# EAGLE board seven_step_with_rot_encoder (EAGLE 5.07)
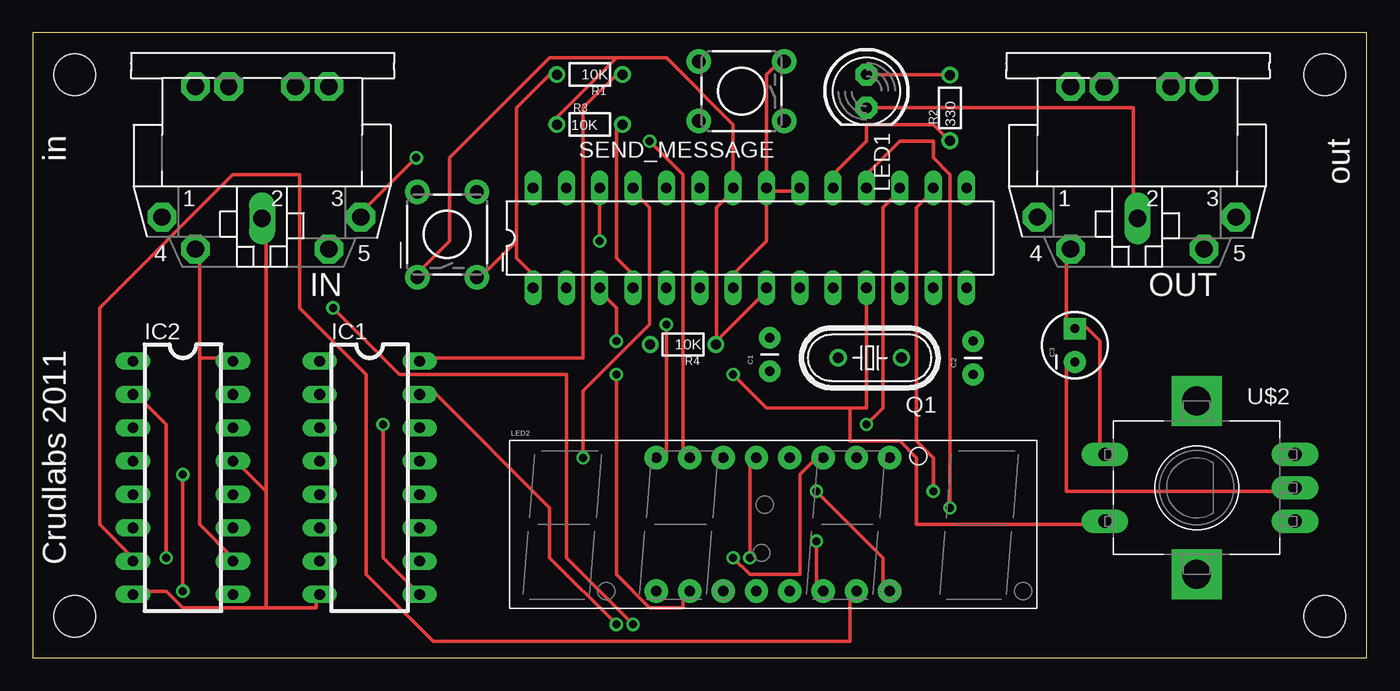
[diagram p0: board, top side]
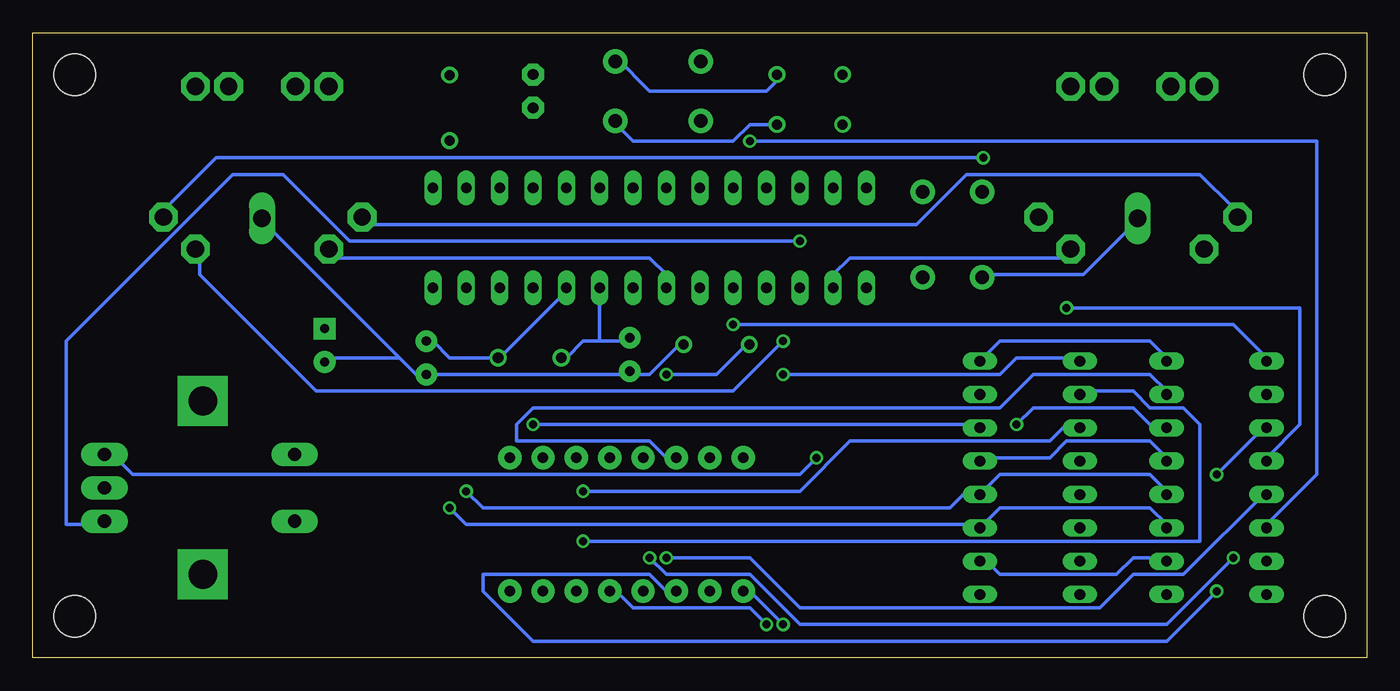
[diagram p1: board, bottom side, seen from below]

Size 101.6 x 47.62 mm. Coordinates in mm from the lower left corner, seen from the top.
Outline: 0,0 101.6,0 101.6,47.62 0,47.62 0,0
Copper layers (1*16): Top 0.035mm / dielectric 1.5mm / Bottom 0.035mm
Design rules "default": minimum track width 10mil, minimum drill 24mil, track to track 8mil, track to pad 8mil, pad to pad 8mil, via to via 8mil, smd to smd 8mil, copper to edge 40mil, drill to drill 8mil, minimum pad ring 10mil, minimum via ring 8mil, stop-mask expansion 4mil, vias tented up to drill 0mil, thermal gap 10mil
Holes 3.17 mm at 3.17,44.45 98.42,44.45 98.42,3.17 3.17,3.17

## Footprints (pad centres in the part's own frame; a part is rotated, then mirrored left to right if it is on the bottom)
DIL28-3 = drill 0.813 long: 1 -16.51,-3.81; 2 -13.97,-3.81; 3 -11.43,-3.81; 4 -8.89,-3.81; 5 -6.35,-3.81; 6 -3.81,-3.81; 7 -1.27,-3.81; 8 1.27,-3.81; 9 3.81,-3.81; 10 6.35,-3.81; 11 8.89,-3.81; 12 11.43,-3.81; 13 13.97,-3.81; 14 16.51,-3.81; 15 16.51,3.81; 16 13.97,3.81; 17 11.43,3.81; 18 8.89,3.81; 19 6.35,3.81; 20 3.81,3.81; 21 1.27,3.81; 22 -1.27,3.81; 23 -3.81,3.81; 24 -6.35,3.81; 25 -8.89,3.81; 26 -11.43,3.81; 27 -13.97,3.81; 28 -16.51,3.81
TACTILE-PTH = drill 1.016 pad 1.88 round: 1 -3.251,2.261; 2 3.251,2.261; 3 -3.251,-2.261; 4 3.251,-2.261
CAP-PTH-SMALL = drill 0.7 pad 1.651 round: 1 0,0; 2 2.54,0
CPOL-RADIAL-10UF-25V = drill 0.7 pad 1.651 square: 1 1.27,0 | drill 0.7 pad 1.651 round: 2 -1.27,0
DIL16 = drill 0.813 long: 1 -8.89,-3.81; 2 -6.35,-3.81; 3 -3.81,-3.81; 4 -1.27,-3.81; 5 1.27,-3.81; 6 3.81,-3.81; 7 6.35,-3.81; 8 8.89,-3.81; 9 8.89,3.81; 10 6.35,3.81; 11 3.81,3.81; 12 1.27,3.81; 13 -1.27,3.81; 14 -3.81,3.81; 15 -6.35,3.81; 16 -8.89,3.81
CP-2350 = drill 1.321 pad 2.184 octagon: 1 7.62,12.58; 3 -7.52,12.58; 4 5.08,15.02; 5 -5.08,15.02; PE -2.54,2.62; PE1 -5.08,2.62; PE2 5.08,2.62; PE@ 2.54,2.62 | drill 1.321 long: 2 0,12.68
LED5MM = drill 0.813 pad 1.676 octagon: A -1.27,0; K 1.27,0
7-SEGMENT-4DIGIT-YOUNGSUN = drill 0.8 pad 1.778 round: 1 -8.89,-5.08; 2 -6.35,-5.08; 3 -3.81,-5.08; 4 -1.27,-5.08; 5 1.27,-5.08; 6 3.81,-5.08; 7 6.35,-5.08; 8 8.89,-5.08; 9 8.89,5.08; 10 6.35,5.08; 11 3.81,5.08; 12 1.27,5.08; 13 -1.27,5.08; 14 -3.81,5.08; 15 -6.35,5.08; 16 -8.89,5.08
HC49U-V = drill 0.813 round: 1 -2.413,0; 2 2.413,0
1/6W-RES = drill 0.762 round: 1 -2.5,0; 2 2.5,0
TW-700198 = drill 2.2 pad 3.81 square: NC1 0,6.604; NC2 0,-6.604 | drill 1 pad 1.778 long: P1 7.493,2.54; P2 7.493,0; P3 7.493,-2.54; P4 -6.985,2.54; P5 -6.985,-2.54

## Placement (x,y rotation side)
_  MEGA8-P  [DIL28-3]  54.61,32 0 top
__  [TACTILE-PTH]  31.56,32.26 90 top
C1  22pF  [CAP-PTH-SMALL]  56.13,21.84 90 top
C2  22pF  [CAP-PTH-SMALL]  71.63,21.59 90 top
C3  [CPOL-RADIAL-10UF-25V]  79.38,23.81 90 top
IC1  74LS595N  [DIL16]  25.65,13.72 270 top
IC2  74LS595N  [DIL16]  11.43,13.72 270 top
IN  MIDIJACK  [CP-2350]  17.46,46.16 180 top
LED1  [LED5MM]  63.5,43.18 270 top
LED2  7-SEGMENT-4DIGIT-YOUNGSUN  [7-SEGMENT-4DIGIT-YOUNGSUN]  56.39,10.16 0 top
OUT  MIDIJACK  [CP-2350]  84.14,46.16 180 top
Q1  16MHz  [HC49U-V]  63.75,22.86 180 top
R1  10K  [1/6W-RES]  42.42,44.45 180 top
R2  330  [1/6W-RES]  69.85,41.91 90 top
R3  10K  [1/6W-RES]  42.42,40.64 0 top
R4  10K  [1/6W-RES]  49.53,23.88 180 top
SEND_MESSAGE  [TACTILE-PTH]  53.98,43.18 180 top
U$2  ALPHA-ROT-ENCODER  [TW-700198]  88.65,12.95 0 top
U$3  [CRUDLABS_LOGO_1]  81.79,3.81 0 top

## Library data of the parts
_ = atmel
__ C1-C3 IC1 IC2 LED2 R1-R4 SEND_MESSAGE = SparkFun
IN LED1 OUT = adafruit
Q1 = crystal
U$2 = RotaryEncoder
U$3 = Steve

## Nets
5V: _.7 _.20 _.21 C3.1 IC1.10 IC1.16 IC2.10 IC2.16 IN.4 OUT.4 R1.1 SEND_MESSAGE.3 U$2.P4
GND: _.8 _.22 __.1 C1.1 C2.1 C3.2 IC1.8 IC1.13 IC2.8 IC2.13 IN.2 LED1.K OUT.2 R3.1 R4.1 U$2.P2
N$1: _.1 __.3 R1.2
N$2: _.9 C1.2 Q1.2
N$3: _.10 C2.2 Q1.1
N$5: _.2 IN.5
N$6: _.3 OUT.5
N$7: IN.3 OUT.3
N$8: IN.1 OUT.1
N$9: _.17 IC1.14
N$11: _.16 IC1.12 IC2.12
N$12: _.19 R2.1
N$13: LED1.A R2.2
N$15: _.4 R3.2 SEND_MESSAGE.1
N$16: _.18 IC1.11 IC2.11
N$17: IC2.5 LED2.11
N$18: IC1.9 IC2.14
N$19: IC1.15 LED2.1
N$20: IC1.1 LED2.2
N$21: IC1.2 LED2.6
N$22: IC1.3 LED2.8
N$23: IC2.15 LED2.14
N$24: IC2.1 LED2.16
N$25: IC2.2 LED2.13
N$26: IC2.3 LED2.3
N$27: IC2.4 LED2.5
N$28: IC2.6 LED2.15
N$29: IC2.7 LED2.7
N$30: _.11 R4.2 U$2.P5
N$31: _.26 U$2.P3
N$32: _.25 U$2.P1

## Tracks (layer width: path | path; a pad name or v marks a point on that pad's centre or on a via)
5V
  Top 0.254: 12.7,22.86 12.7,30.48 IN.4 | 12.7,22.86 12.7,10.16 15.24,7.62 IC2.10 | 12.7,22.86 15.24,22.86 IC2.16 | OUT.4 78.74,30.48 78.74,25.4 C3.1 80.01,25.4 81.28,24.13 81.28,15.24 U$2.P4 | 55.88,35.56 55.88,31.75 53.34,29.21 _.7 | 55.88,35.56 58.42,35.56 _.20 | 55.88,35.56 _.21 55.88,44.45 57.15,45.72 SEND_MESSAGE.3 | IC1.16 30.48,22.86 41.91,22.86 41.91,41.91 44.45,44.45 R1.1
  Bottom 0.254: IC1.10 29.21,7.62 27.94,6.35 19.05,6.35 17.78,7.62 15.24,7.62 IC2.10 | IC1.16 27.94,24.13 16.51,24.13 15.24,22.86 IC2.16 | R1.1 44.45,44.45 45.72,43.18 54.61,43.18 57.15,45.72 SEND_MESSAGE.3 | OUT.4 78.74,30.48 54.61,30.48 53.34,29.21 _.7
GND
  Top 0.254: 17.78,3.81 21.59,3.81 21.59,5.08 IC1.8 | 17.78,3.81 11.43,3.81 10.16,5.08 7.62,5.08 IC2.8 | 17.78,12.7 15.24,15.24 IC2.13 | 17.78,3.81 17.78,12.7 | 17.78,12.7 17.78,33.02 IN.2 | LED1.K 83.82,41.91 83.82,34.29 OUT.2 | 44.45,45.72 39.37,40.64 R3.1 | 44.45,45.72 48.26,45.72 53.34,40.64 _.22 53.34,35.56 52.07,34.29 52.07,24.13 | 52.07,24.13 55.88,27.94 _.8 | U$2.P2 95.25,12.7 78.74,12.7 78.74,22.86 C3.2 | 52.07,24.13 R4.1 | 44.45,45.72 39.37,45.72 31.75,38.1 31.75,31.75 29.21,29.21 __.1
  Bottom 0.254: __.1 29.21,29.21 21.59,29.21 17.78,33.02 IN.2 | IC1.13 29.21,15.24 24.13,15.24 22.86,16.51 16.51,16.51 15.24,15.24 IC2.13 | 55.88,21.59 54.61,21.59 52.07,24.13 R4.1 | 73.66,22.86 72.39,21.59 C2.1 55.88,21.59 | 73.66,22.86 78.74,22.86 C3.2 | 55.88,21.59 C1.1 | 73.66,22.86 83.82,33.02 OUT.2
N$1
  Top 0.254: 36.83,31.75 36.83,30.48 38.1,29.21 _.1 | 36.83,31.75 36.83,41.91 39.37,44.45 R1.2 | 36.83,31.75 34.29,29.21 __.3
N$2
  Bottom 0.254: 58.42,24.13 55.88,24.13 C1.2 | 58.42,24.13 59.69,24.13 60.96,22.86 Q1.2 | 58.42,24.13 _.9
N$3
  Bottom 0.254: _.10 60.96,27.94 66.04,22.86 Q1.1 69.85,22.86 71.12,24.13 C2.2
N$5
  Bottom 0.254: _.2 40.64,29.21 39.37,30.48 22.86,30.48 IN.5
N$6  (via drill 0.61)
  Top 0.254: v44.45,24.13 44.45,26.67 43.18,27.94 _.3
  Bottom 0.254: v44.45,24.13 48.26,20.32 80.01,20.32 88.9,29.21 88.9,30.48 OUT.5
N$7  (via drill 0.61)
  Top 0.254: v29.21,38.1 25.4,34.29 IN.3
  Bottom 0.254: v29.21,38.1 87.63,38.1 91.44,34.29 OUT.3
N$8
  Bottom 0.254: IN.1 10.16,34.29 12.7,36.83 30.48,36.83 34.29,33.02 76.2,33.02 OUT.1
N$9  (via drill 0.61)
  Top 0.254: v63.5,17.78 64.77,19.05 64.77,34.29 66.04,35.56 _.17
  Bottom 0.254: v63.5,17.78 30.48,17.78 IC1.14
N$11  (via drill 0.61)
  Top 0.254: v68.58,12.7 68.58,15.24 67.31,16.51 67.31,34.29 68.58,35.56 _.16
  Bottom 0.254: IC2.12 15.24,12.7 16.51,13.97 27.94,13.97 IC1.12 30.48,12.7 31.75,11.43 67.31,11.43 v68.58,12.7
N$12
  Top 0.254: R2.1 69.85,39.37 68.58,40.64 63.5,40.64 63.5,39.37 60.96,36.83 _.19
N$13
  Top 0.254: LED1.A 69.85,44.45 R2.2
N$15
  Top 0.254: R3.2 44.45,40.64 44.45,30.48 45.72,29.21 _.4
  Bottom 0.254: SEND_MESSAGE.1 57.15,40.64 55.88,39.37 48.26,39.37 46.99,40.64 R3.2 44.45,40.64
N$16  (via drill 0.61)
  Top 0.254: v69.85,11.43 69.85,36.83 68.58,38.1 68.58,39.37 66.04,39.37 63.5,36.83 _.18
  Bottom 0.254: IC2.11 15.24,10.16 16.51,11.43 27.94,11.43 IC1.11 30.48,10.16 68.58,10.16 v69.85,11.43
N$17  (via drill 0.61)
  Top 0.254: v53.34,7.62 54.61,6.35 58.42,6.35 58.42,13.97 59.69,15.24 LED2.11
  Bottom 0.254: v53.34,7.62 46.99,7.62 43.18,3.81 20.32,3.81 17.78,6.35 13.97,6.35 7.62,12.7 IC2.5
N$18  (via drill 0.61)
  Top 0.254: v26.67,17.78 26.67,7.62 IC1.9
  Bottom 0.254: v26.67,17.78 25.4,19.05 17.78,19.05 16.51,17.78 15.24,17.78 IC2.14
N$19  (via drill 0.61)
  Top 0.254: v44.45,2.54 39.37,7.62 39.37,11.43 30.48,20.32 IC1.15
  Bottom 0.254: v44.45,2.54 46.99,5.08 LED2.1
N$20  (via drill 0.61)
  Top 0.254: v44.45,21.59 44.45,6.35 46.99,3.81 49.53,3.81 49.53,5.08 LED2.2
  Bottom 0.254: v44.45,21.59 27.94,21.59 26.67,22.86 22.86,22.86 IC1.1
N$21  (via drill 0.61)
  Top 0.254: v59.69,8.89 59.69,5.08 LED2.6
  Bottom 0.254: v59.69,8.89 12.7,8.89 12.7,17.78 13.97,19.05 16.51,19.05 17.78,20.32 21.59,20.32 IC1.2
N$22  (via drill 0.61)
  Top 0.254: v59.69,12.7 64.77,7.62 64.77,5.08 LED2.8
  Bottom 0.254: v59.69,12.7 43.18,12.7 39.37,16.51 24.13,16.51 22.86,17.78 IC1.3
N$23
  Bottom 0.254: IC2.15 15.24,20.32 16.51,21.59 25.4,21.59 27.94,19.05 63.5,19.05 64.77,17.78 64.77,16.51 54.61,16.51 53.34,15.24 LED2.14
N$24  (via drill 0.61)
  Top 0.254: v48.26,25.4 48.26,15.24 LED2.16
  Bottom 0.254: v48.26,25.4 10.16,25.4 7.62,22.86 IC2.1
N$25  (via drill 0.61)
  Top 0.254: v10.16,7.62 10.16,17.78 7.62,20.32 IC2.2 | v54.61,7.62 54.61,15.24 LED2.13
  Bottom 0.254: v10.16,7.62 15.24,2.54 43.18,2.54 46.99,6.35 53.34,6.35 v54.61,7.62
N$26  (via drill 0.61)
  Top 0.254: v11.43,5.08 v11.43,13.97
  Bottom 0.254: v11.43,13.97 7.62,17.78 IC2.3 | v11.43,5.08 15.24,1.27 63.5,1.27 67.31,5.08 67.31,6.35 54.61,6.35 53.34,5.08 LED2.3
N$27  (via drill 0.61)
  Top 0.254: v22.86,26.67 27.94,21.59 40.64,21.59 40.64,7.62 v45.72,2.54
  Bottom 0.254: v22.86,26.67 5.08,26.67 5.08,17.78 7.62,15.24 IC2.4 | v45.72,2.54 46.99,3.81 55.88,3.81 57.15,5.08 LED2.5
N$28  (via drill 0.61)
  Top 0.254: v46.99,39.37 49.53,36.83 49.53,15.24 LED2.15
  Bottom 0.254: v46.99,39.37 3.81,39.37 3.81,13.97 7.62,10.16 IC2.6
N$29
  Top 0.254: IC2.7 7.62,7.62 5.08,10.16 5.08,26.67 15.24,36.83 20.32,36.83 20.32,26.67 25.4,21.59 25.4,6.35 30.48,1.27 62.23,1.27 62.23,5.08 LED2.7
N$30  (via drill 0.61)
  Top 0.254: v53.34,21.59 55.88,19.05 62.23,19.05 | 62.23,19.05 63.5,19.05 _.11 | 62.23,19.05 62.23,16.51 66.04,16.51 67.31,15.24 67.31,10.16 81.28,10.16 U$2.P5
  Bottom 0.254: v53.34,21.59 49.53,21.59 46.99,24.13 R4.2
N$31  (via drill 0.61)
  Top 0.254: v43.18,31.75 _.26
  Bottom 0.254: v43.18,31.75 77.47,31.75 82.55,36.83 86.36,36.83 99.06,24.13 99.06,10.16 96.52,10.16 U$2.P3
N$32  (via drill 0.61)
  Top 0.254: v41.91,15.24 41.91,20.32 46.99,25.4 46.99,34.29 45.72,35.56 _.25
  Bottom 0.254: v41.91,15.24 43.18,13.97 93.98,13.97 95.25,15.24 U$2.P1

## Text on the board
tPlace: in | out | Crudlabs 2011